# Altium PCB PCB.PcbDoc
Units mm, origin at the board's own origin, x right, y up, seen from the top; angles counter-clockwise.
Board outline 56 x 59 mm, 2 copper layers (Top Layer, Bottom Layer), stack 0.452 mm thick; 8 components, 9 nets, 66 pads, 0 vias.
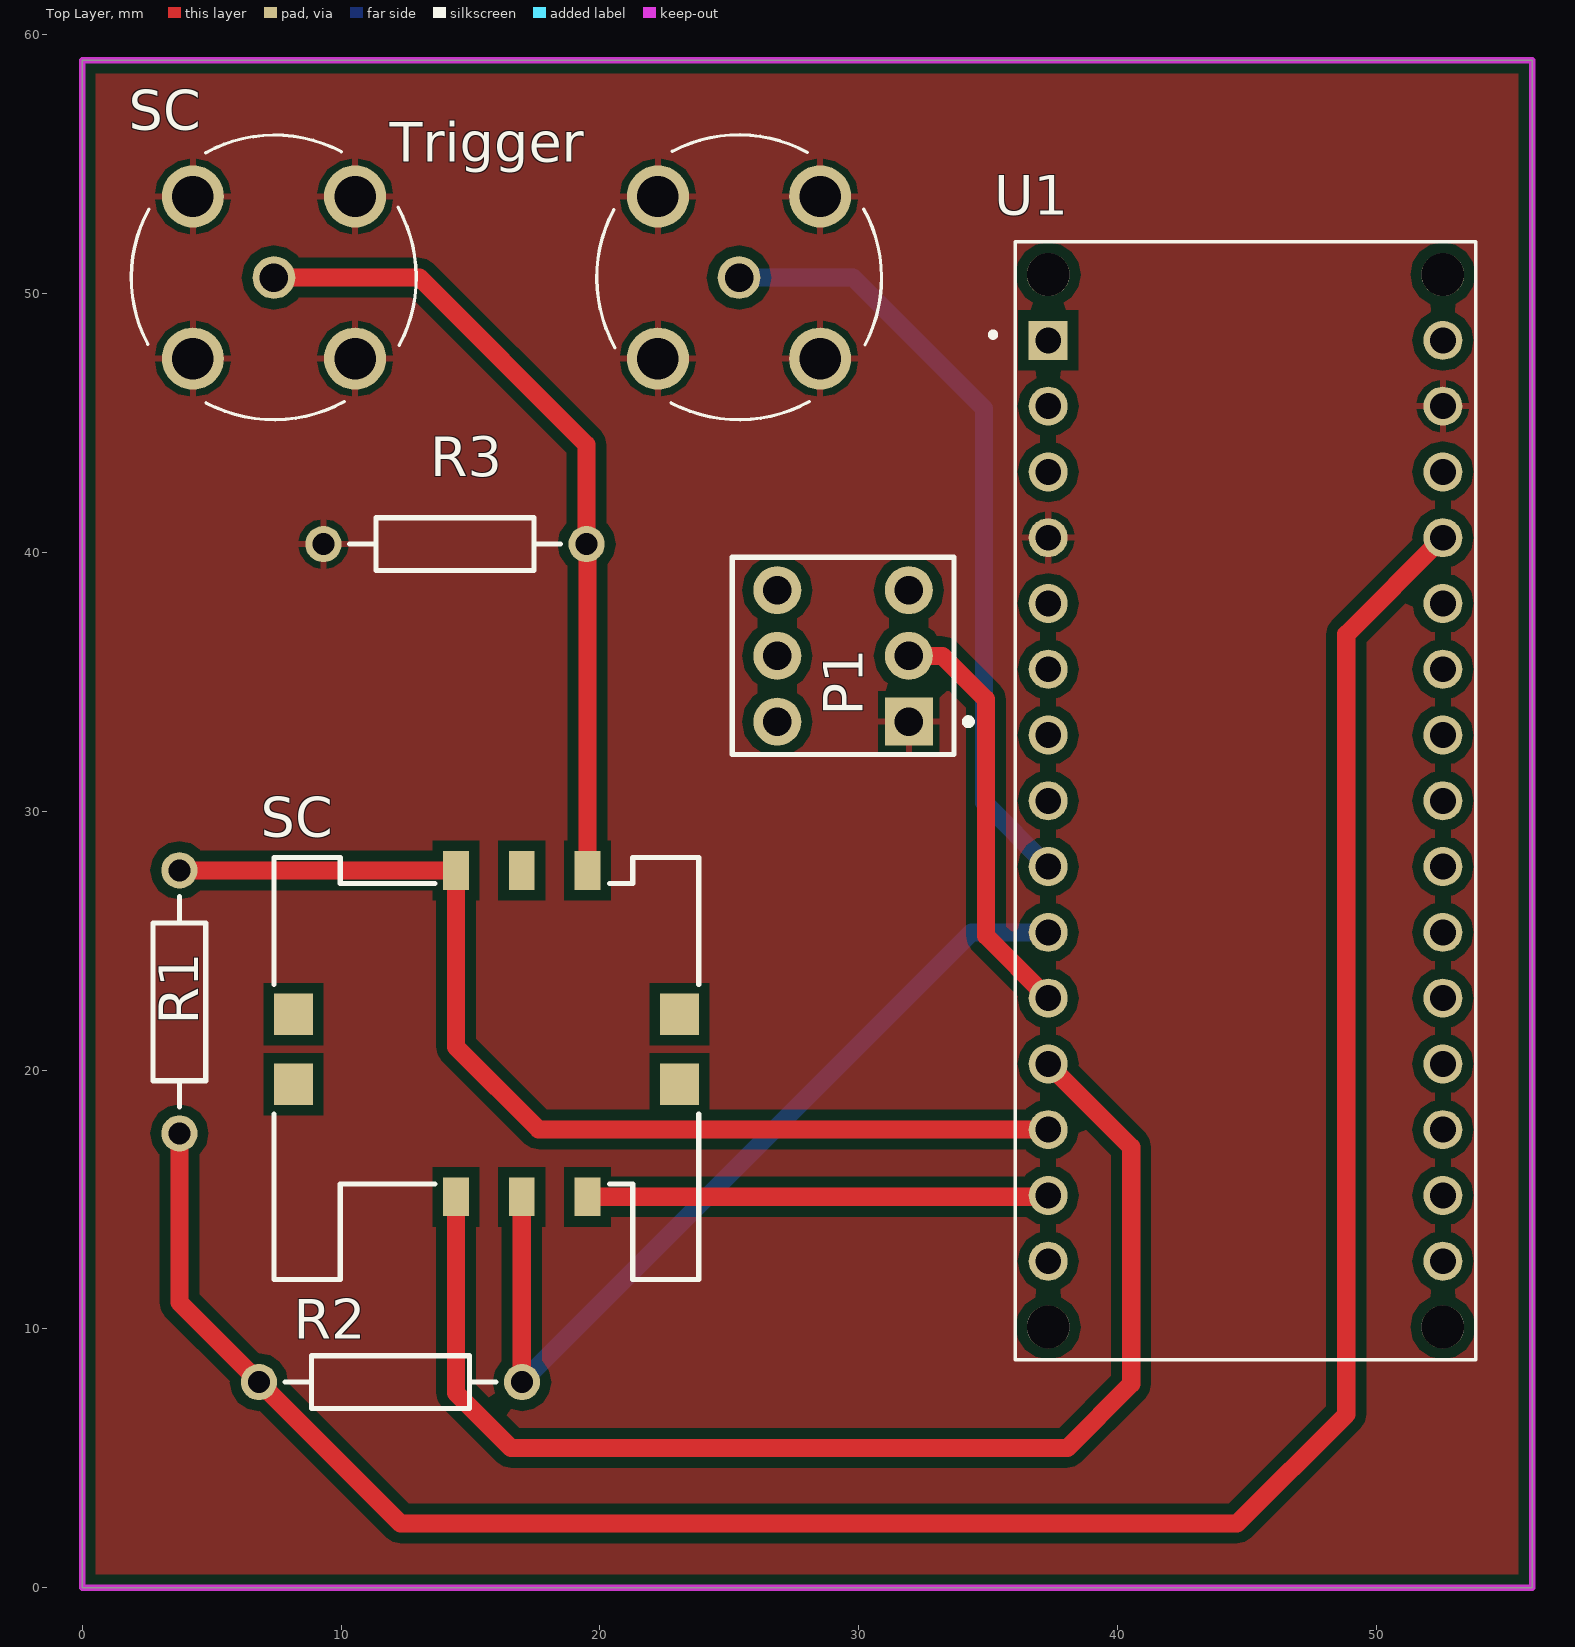
[diagram p0: Top Layer view]
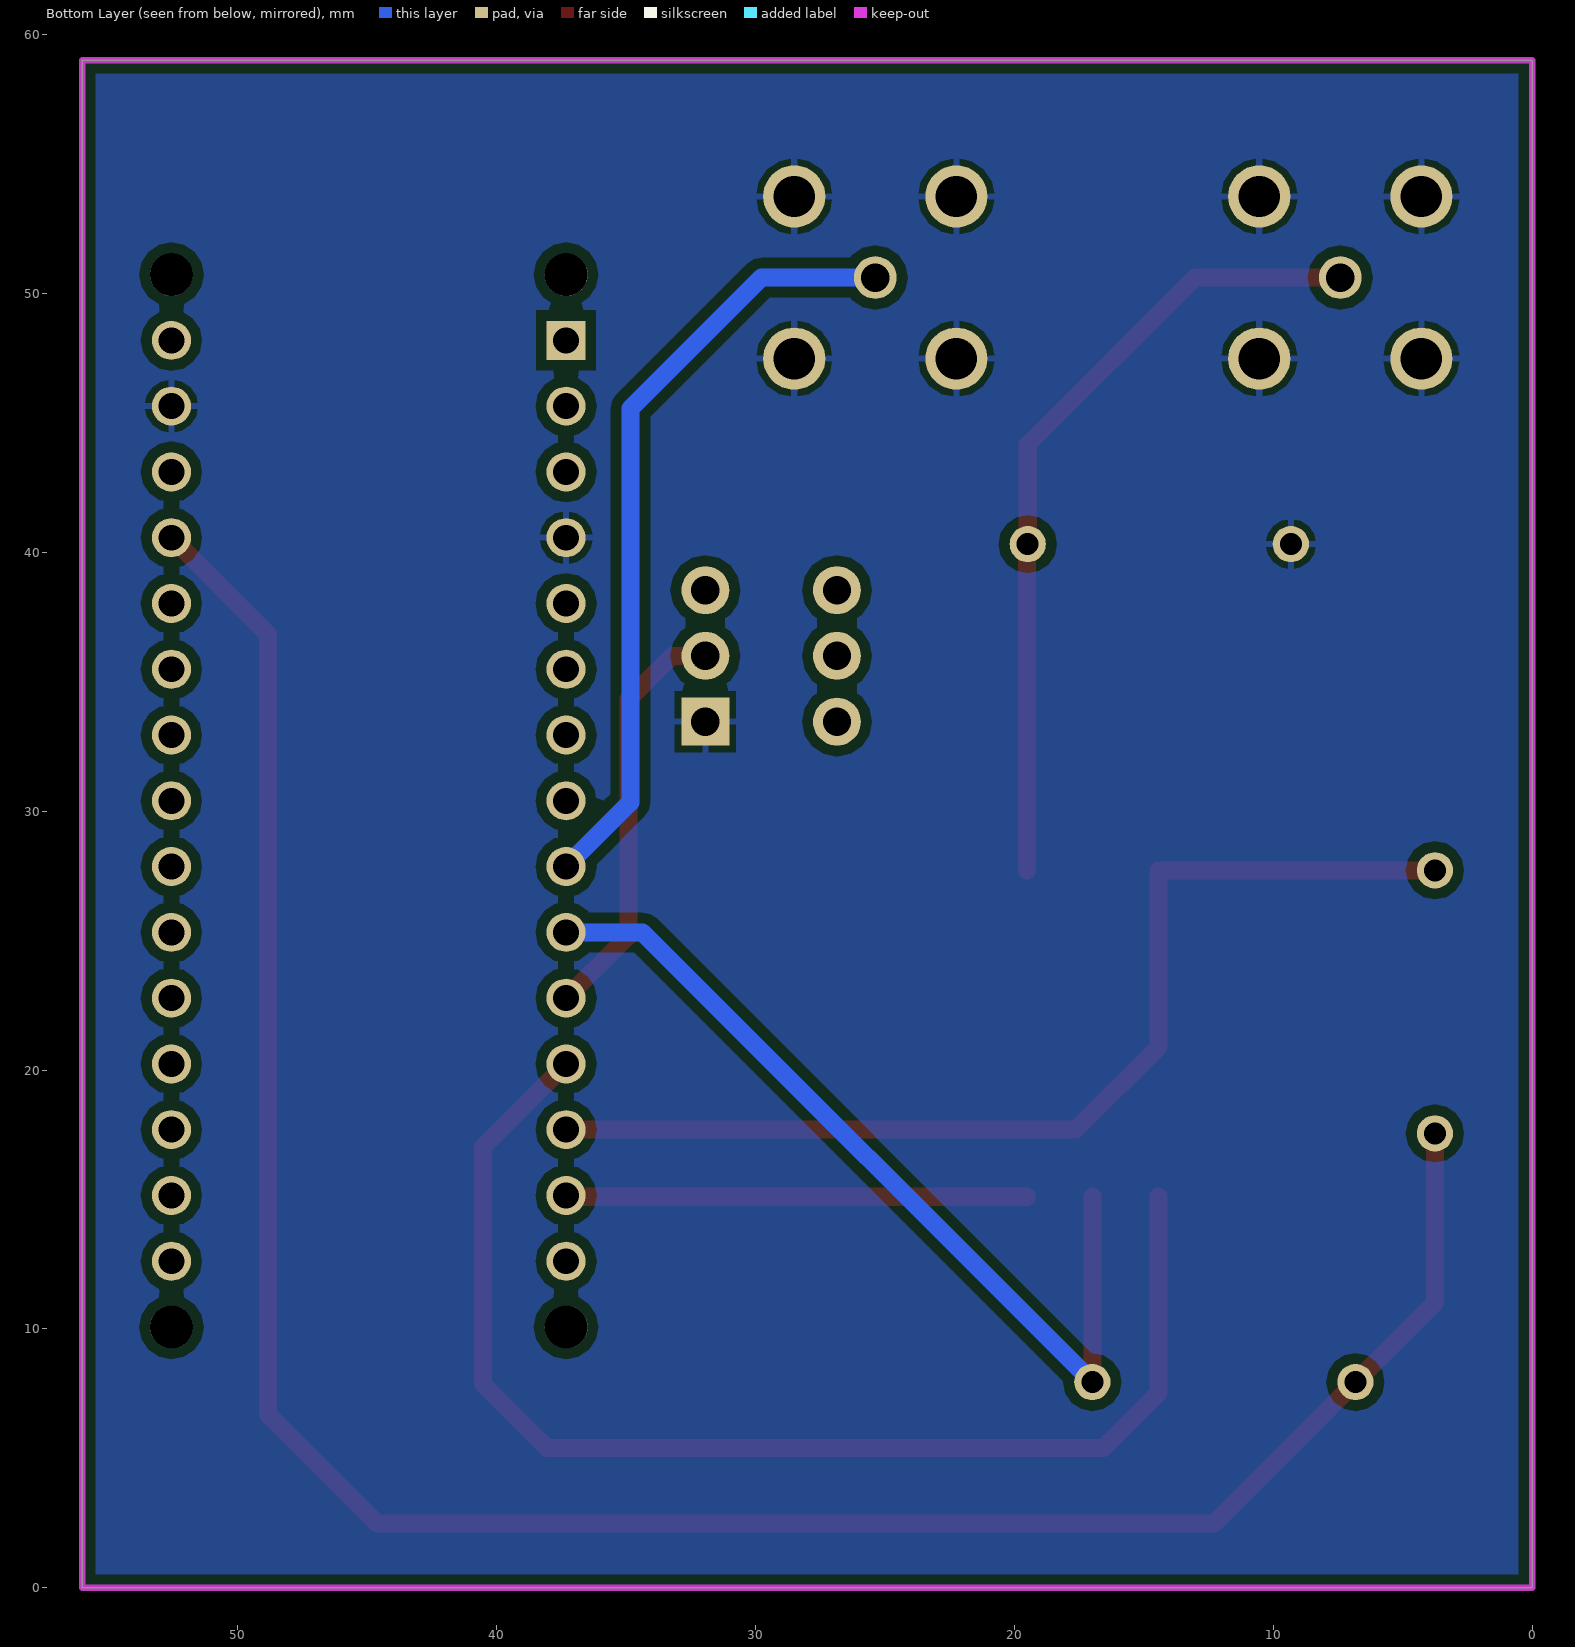
[diagram p1: Bottom Layer view, seen from below]

## Layer stack, top to bottom
Top Solder: solder mask 0.0102, Solder Resist, Dk 3.5
Top Layer: signal copper 0.0356
Dielectric 1: core 0.254, FR-4, Dk 4.2
Dielectric 2: prepreg 0.127, Dk 4.2
Bottom Layer: signal copper 0.0356
Bottom Solder: solder mask 0.0102, Solder Resist, Dk 3.5

## Board outline
0,0 0,59 56,59 56,0

## Design rules (kind name [scope] priority, off if disabled: settings)
Clearance "PolyGon Pour Clearance" [InPolygon] p1: gap=0.4 ignorepadtopadclearanceinfootprint=FALSE
Clearance [All] p2: gap=0.4 ignorepadtopadclearanceinfootprint=FALSE
PolygonConnect [All] p1: connectstyle=Relief reliefconductorwidth=0.254 reliefentries=4 polygonreliefangle="90 Angle" airgapwidth=0.254
RoutingVias [All] p1: holewidth=0.711 width=1.27 viastyle="Through Hole" minholewidth=0.711 minwidth=1.27 maxholewidth=0.711 maxwidth=1.27
SolderMaskExpansion [All] p1: expansion=0.102
Width [All] p1: maxlimit=0.7 minlimit=0.7 preferedwidth=0.7
30 further rules are at their usual default settings.

## Components (designator, comment, footprint, x,y, rotation, side; value= is the part's Value field where it differs from the comment)
P1 "On/Off" DPDT-6 29.388,35.992 r180 top
R1 "Res2" AXIAL-0.4 3.759,22.631 r270 top value=10K
R2 "Res2" AXIAL-0.4 11.909,7.95 r180 top value=10K
R3 "Res2" AXIAL-0.4 14.402,40.31 r0 top value=10
SC "SimCard" GCT_SIM2055-6-0-XX-00-X_REVI 15.617,21.404 r180 top (schematic designator J)
SC "BNC" TE_5-1634503-1 7.411,50.603 r90 top
Trigger "5-1634503-1" TE_5-1634503-1 25.369,50.603 r0 top
U1 "ArduinoNano" MODULE_A000005 44.929,30.396 r0 top

## Footprints (in the part's own frame and the unit in brackets; to place one, negate y for a bottom-side part, rotate by r counter-clockwise, add the part's x,y. Pads: shape width x height; smd on the part's side, far side on the other; paste and mask are expansions set on the pad)
AXIAL-0.4 [mm] "Axial Device, Thru-Hole; 2 Leads; 0.4 in Pin Spacing"
  round 1.4 hole 0.85: 1(-5.08,0) 2(5.08,0)
  silkscreen extent -4.06,-1.02 4.06,1.02
DPDT-6 [mm] "Switch; 6 Leads"
  rect 1.85x1.85 hole 1.1: 1(-2.54,2.54)
  round 1.85 hole 1.1: 2(-2.54,0) 3(-2.54,-2.54) 4(2.54,-2.54) 5(2.54,0) 6(2.54,2.54)
  silkscreen extent -4.96,-3.81 4.28,3.81
GCT_SIM2055-6-0-XX-00-X_REVI [mm]
  rect 1x1.5 smd: 1(-3.9,6.3) 2(-1.36,6.3) 3(1.18,6.3) 5(-3.9,-6.3) 6(-1.36,-6.3) 7(1.18,-6.3)
  rect 1.5x1.6 smd: 8(-7.45,-0.75) 9(7.45,-0.75) 10(7.45,1.95) 11(-7.45,1.95)
  silkscreen extent -8.2,-6.8 8.2,9.5
MODULE_A000005 [mm]
  rect 1.508x1.508 hole 1: 1(-7.62,17.78)
  round 1.508 hole 1: 2(-7.62,15.24) 3(-7.62,12.7) 4(-7.62,10.16) 5(-7.62,7.62) 6(-7.62,5.08) 7(-7.62,2.54) 8(-7.62,0) 9(-7.62,-2.54) 10(-7.62,-5.08) 11(-7.62,-7.62) 12(-7.62,-10.16) 13(-7.62,-12.7) 14(-7.62,-15.24) 15(-7.62,-17.78) 16(7.62,-17.78) 17(7.62,-15.24) 18(7.62,-12.7) 19(7.62,-10.16) 20(7.62,-7.62) 21(7.62,-5.08) 22(7.62,-2.54) 23(7.62,0) 24(7.62,2.54) 25(7.62,5.08) 26(7.62,7.62) 27(7.62,10.16) 28(7.62,12.7) 29(7.62,15.24) 30(7.62,17.78)
  round 1.651 hole 1.651 unplated: ""(-7.62,-20.32) ""(-7.62,20.32) ""(7.62,-20.32) ""(7.62,20.32)
  silkscreen extent -9.85,-21.59 8.89,21.59
TE_5-1634503-1 [mm]
  round 1.65 hole 1.1: 1(0,0)
  round 2.4 hole 1.6: 2(-3.13,3.13) 3(3.13,3.13) 4(3.13,-3.13) 5(-3.13,-3.13)
  silkscreen extent -5.49,-5.49 5.5,5.51

## Part data
P1: library part MHDR2X3, "Header, 3-Pin, Dual row", LatestRevisionDate=17-Jul-2002, LatestRevisionNote="Re-released for DXP Platform.", Publisher="Altium Limited"
R1 R2 R3: "Resistor", LatestRevisionDate=17-Jul-2002, LatestRevisionNote="Re-released for DXP Platform.", PackageDescription="Axial Device, Thru-Hole; 2 Leads; 0.4 in Pin Spacing", PackageReference=AXIAL-0.4, Published=8-Jun-2000, Publisher="Altium Limited"
SC: library part SIM2055-6-0-XX-00-X_REVI, "6 Position Card Connector Mini SIM Surface Mount, Right Angle Gold", Package=None, Availability=Unavailable, MF="Global Connector Technology", MP=SIM2055-6-0-22-00-A, Price=None, SnapEDA_Link=https://www.snapeda.com/parts/SIM2055-6-0-22-00-A/Global%20Connector%20Technology/view-part/812982/?ref=snap
SC: library part 5-1634503-1, "Rf / Coaxial Connector, Bnc Coaxial, Straight Jack, Solder, 50 Ohm, Brass", Package=None, Availability=Unavailable, EU_RoHS_Compliance=Compliant, MF="TE Connectivity", MP=5-1634503-1, Number_of_Positions=1, Price=None, SnapEDA_Link=https://www.snapeda.com/parts/5-1634503-1/TE%20Connectivity%20AMP%20Connectors/view-part/441267/?ref=snap, TE_purchase_URL=https://www.te.com/usa-en/product-5-1634503-1.html?te_bu=Cor&te_type=disp&te_campaign=seda_glo_cor-seda-global-disp-prtnr-fy19-seda-model-bom-cta_sma-317_1&elqCampaignId=32493
Trigger: "Rf / Coaxial Connector, Bnc Coaxial, Straight Jack, Solder, 50 Ohm, Brass", Package=None, Availability=Unavailable, EU_RoHS_Compliance=Compliant, MF="TE Connectivity", MP=5-1634503-1, Number_of_Positions=1, Price=None, SnapEDA_Link=https://www.snapeda.com/parts/5-1634503-1/TE%20Connectivity%20AMP%20Connectors/view-part/441267/?ref=snap, TE_purchase_URL=https://www.te.com/usa-en/product-5-1634503-1.html?te_bu=Cor&te_type=disp&te_campaign=seda_glo_cor-seda-global-disp-prtnr-fy19-seda-model-bom-cta_sma-317_1&elqCampaignId=32493
U1: library part A000005, "CLOCK SAW OSCILLATOR SEAM7050 T&", Package=None, Digi-Key_Part_Number=SPA000005J-ND, Digi-Key_Purchase_URL=https://www.digikey.com/product-detail/en/diodes-incorporated/SPA000005J/SPA000005J-ND/9769570?utm_source=snapeda&utm_medium=aggregator&utm_campaign=symbol, MF=Arduino, MP=A000005, SnapEDA_Link=https://www.snapeda.com/parts/A000005/Arduino/view-part/51027/?ref=snap

## Nets (pads, with @x,y where several pads share a name; then routed paths per layer and width w, separated by ;. In a path a pad name is that pad's centre, name@x,y a point inside that pad or via, vN(x,y) a via of type N, cw(c..) or ccw(c..) an arc to the next point about the centre after c; other vN are vias at no path point)
CLK: SC.3@14.437,15.104 U1.12 | length 49.2
  Top Layer w0.7: SC.3@14.437,15.104 14.437,7.534 16.561,5.41 38.049,5.41 40.513,7.874 40.513,17.032 U1.12
GND: P1.1 R3.1 SC.2@4.281,47.473 SC.3@4.281,53.733 SC.4 SC.5@10.541,47.473 Trigger.2 Trigger.3 Trigger.4 Trigger.5 U1.4 U1.29
I/O: R1.1 SC.7 U1.13 | length 41.7
  Top Layer w0.7: R1.1 14.43,27.711 SC.7 14.437,20.894 17.636,17.696 U1.13
Inserted_A: P1.2 U1.11 | length 16.2
  Top Layer w0.7: P1.2 33.223,35.992 34.9,34.315 34.9,25.185 U1.11
RST: R2.1 SC.2@16.977,15.104 U1.10 | length 34.7
  Top Layer w0.7: SC.2@16.977,15.104 16.977,7.962 R2.1
  Bottom Layer w0.7: R2.1 34.354,25.316 U1.10
SC_R: R3.2 SC.1@7.411,50.603 SC.5@19.517,27.704 | length 31.2
  Top Layer w0.7: SC.1@7.411,50.603 13.024,50.603 19.482,44.145 R3.2 19.517,40.274 SC.5@19.517,27.704
SCVCC: SC.1@19.517,15.104 U1.14 | length 17.8
  Top Layer w0.7: SC.1@19.517,15.104 37.257,15.104 U1.14
Trigger: Trigger.1 U1.9 | length 30.3
  Bottom Layer w0.7: Trigger.1 29.763,50.603 34.823,45.542 34.823,30.341 U1.9
VCC: R1.2 R2.2 U1.27 | length 92.3
  Top Layer w0.7: R1.2 3.759,11.02 R2.2 12.29,2.489 44.602,2.489 48.819,6.706 48.819,36.826 U1.27
pads on no net: P1.3 P1.4 P1.5 P1.6 SC.6 SC.8 SC.9 SC.10 SC.11 U1. U1.1 U1.2 U1.3 U1.5 U1.6 U1.7 U1.8 U1.15 U1.16 U1.17 U1.18 U1.19 U1.20 U1.21 U1.22 U1.23 U1.24 U1.25 U1.26 U1.28 U1.30

## Polygon pours and split planes (outlines as drawn)
GND on Top Layer "Layer1-GND" (solid, pour order 68): 0,0 0,59 56,59 56,0
GND on Bottom Layer "Layer2-GND" (solid, pour order 70): 0,0 0,59 56,59 56,0

## Keep-outs
Keep-Out Layer:
  the board outline again, w0.254